# Altium PCB Layer1.PcbDoc
Units mil, origin at the board's own origin, x right, y up, seen from the top; angles counter-clockwise.
Board outline 6000 x 6000 mil, 4 copper layers (Top Layer, Mid Layer 1, Mid Layer 2, Bottom Layer), stack 30.315 mil thick; 1 components, 0 nets, 92 pads, 0 vias.
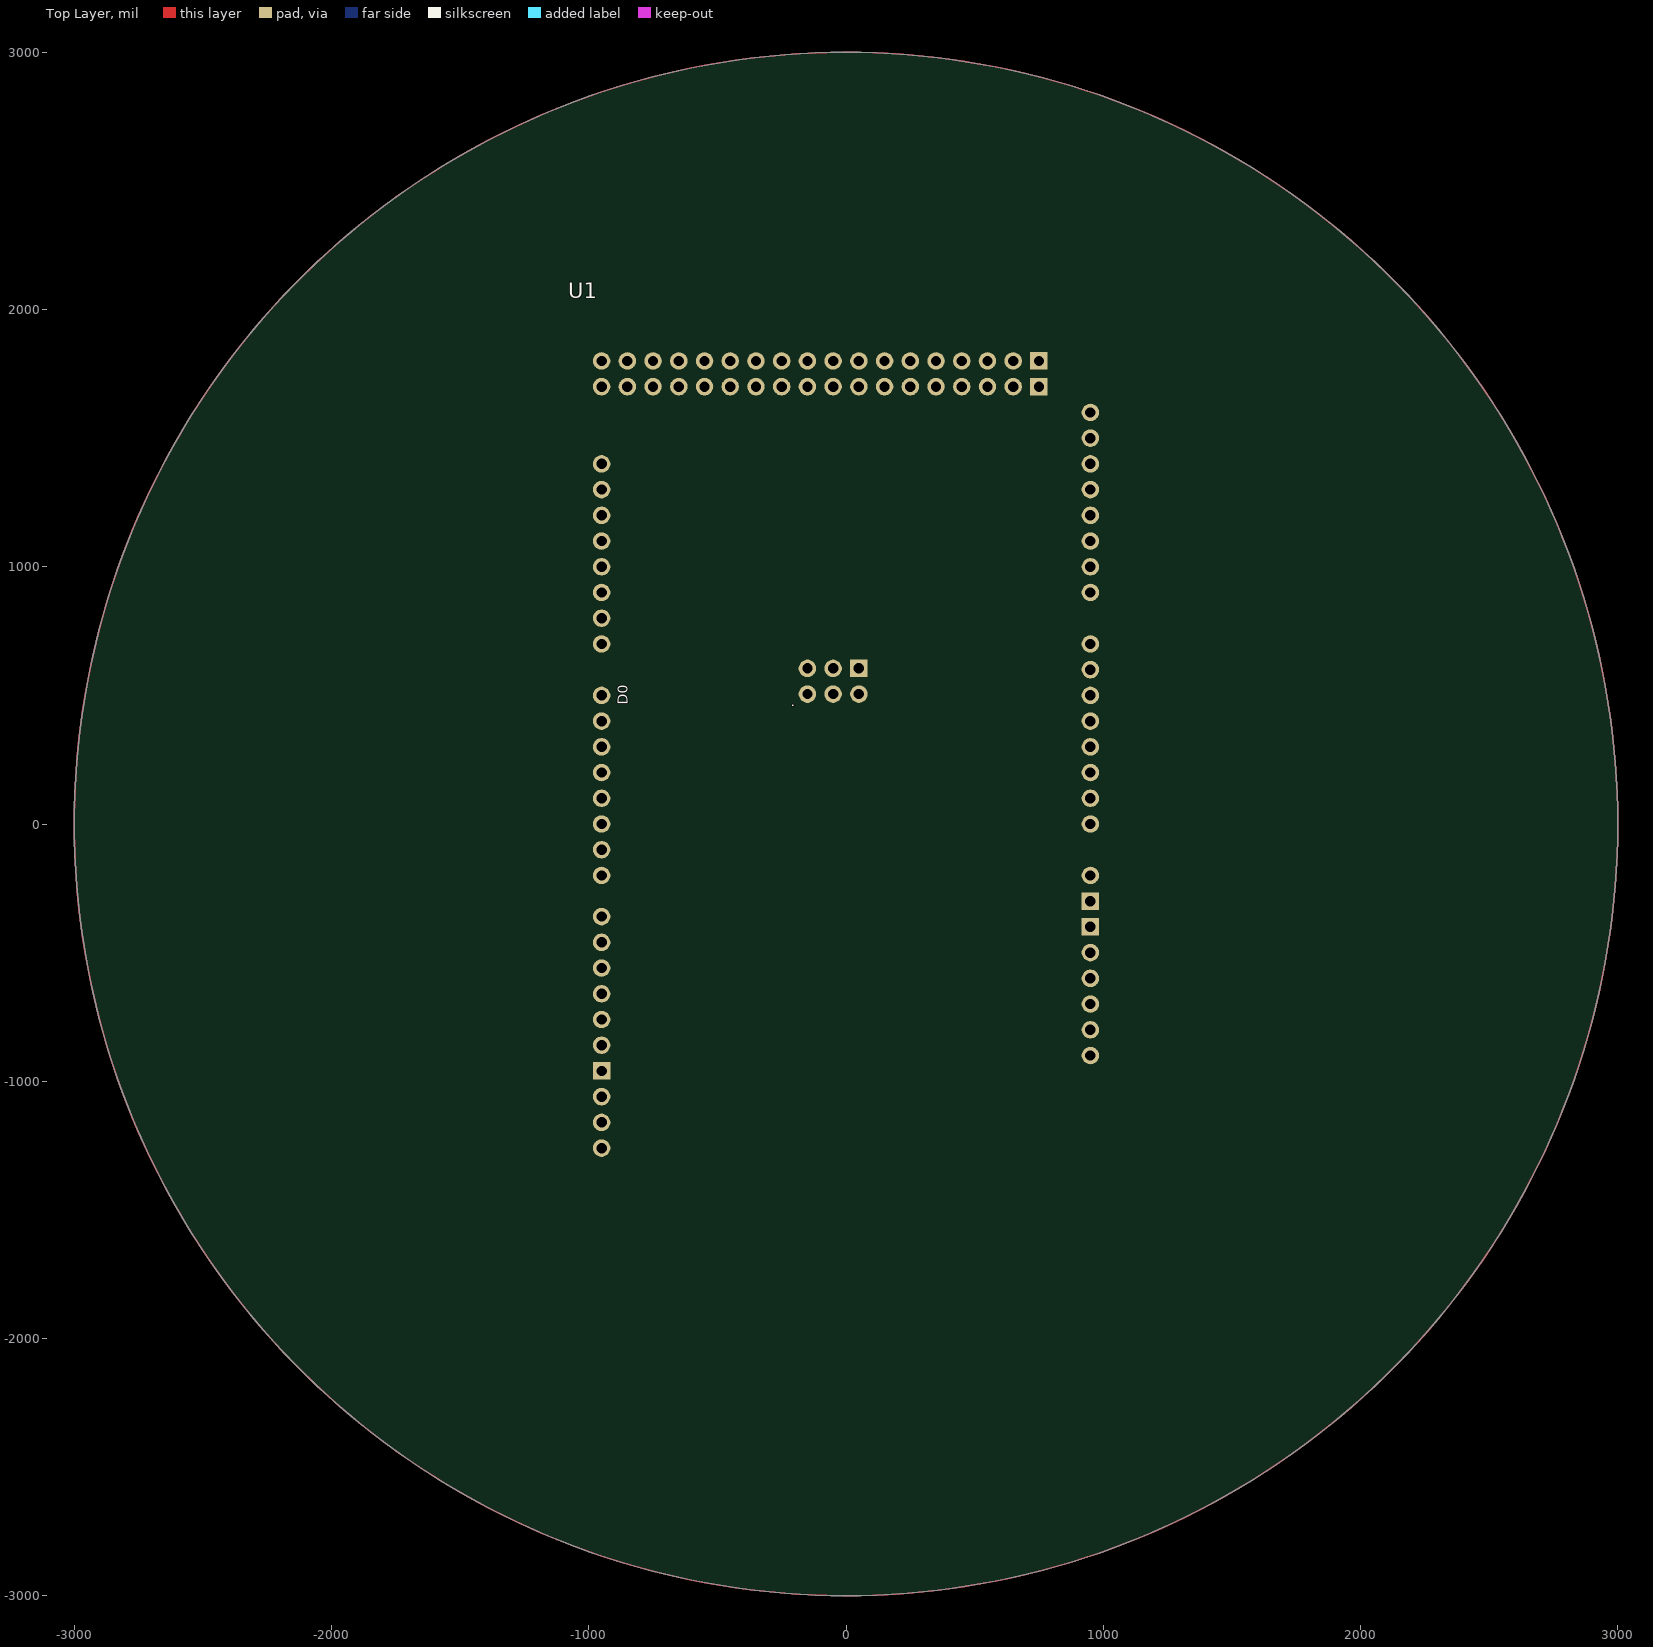
[diagram p0: Top Layer view]
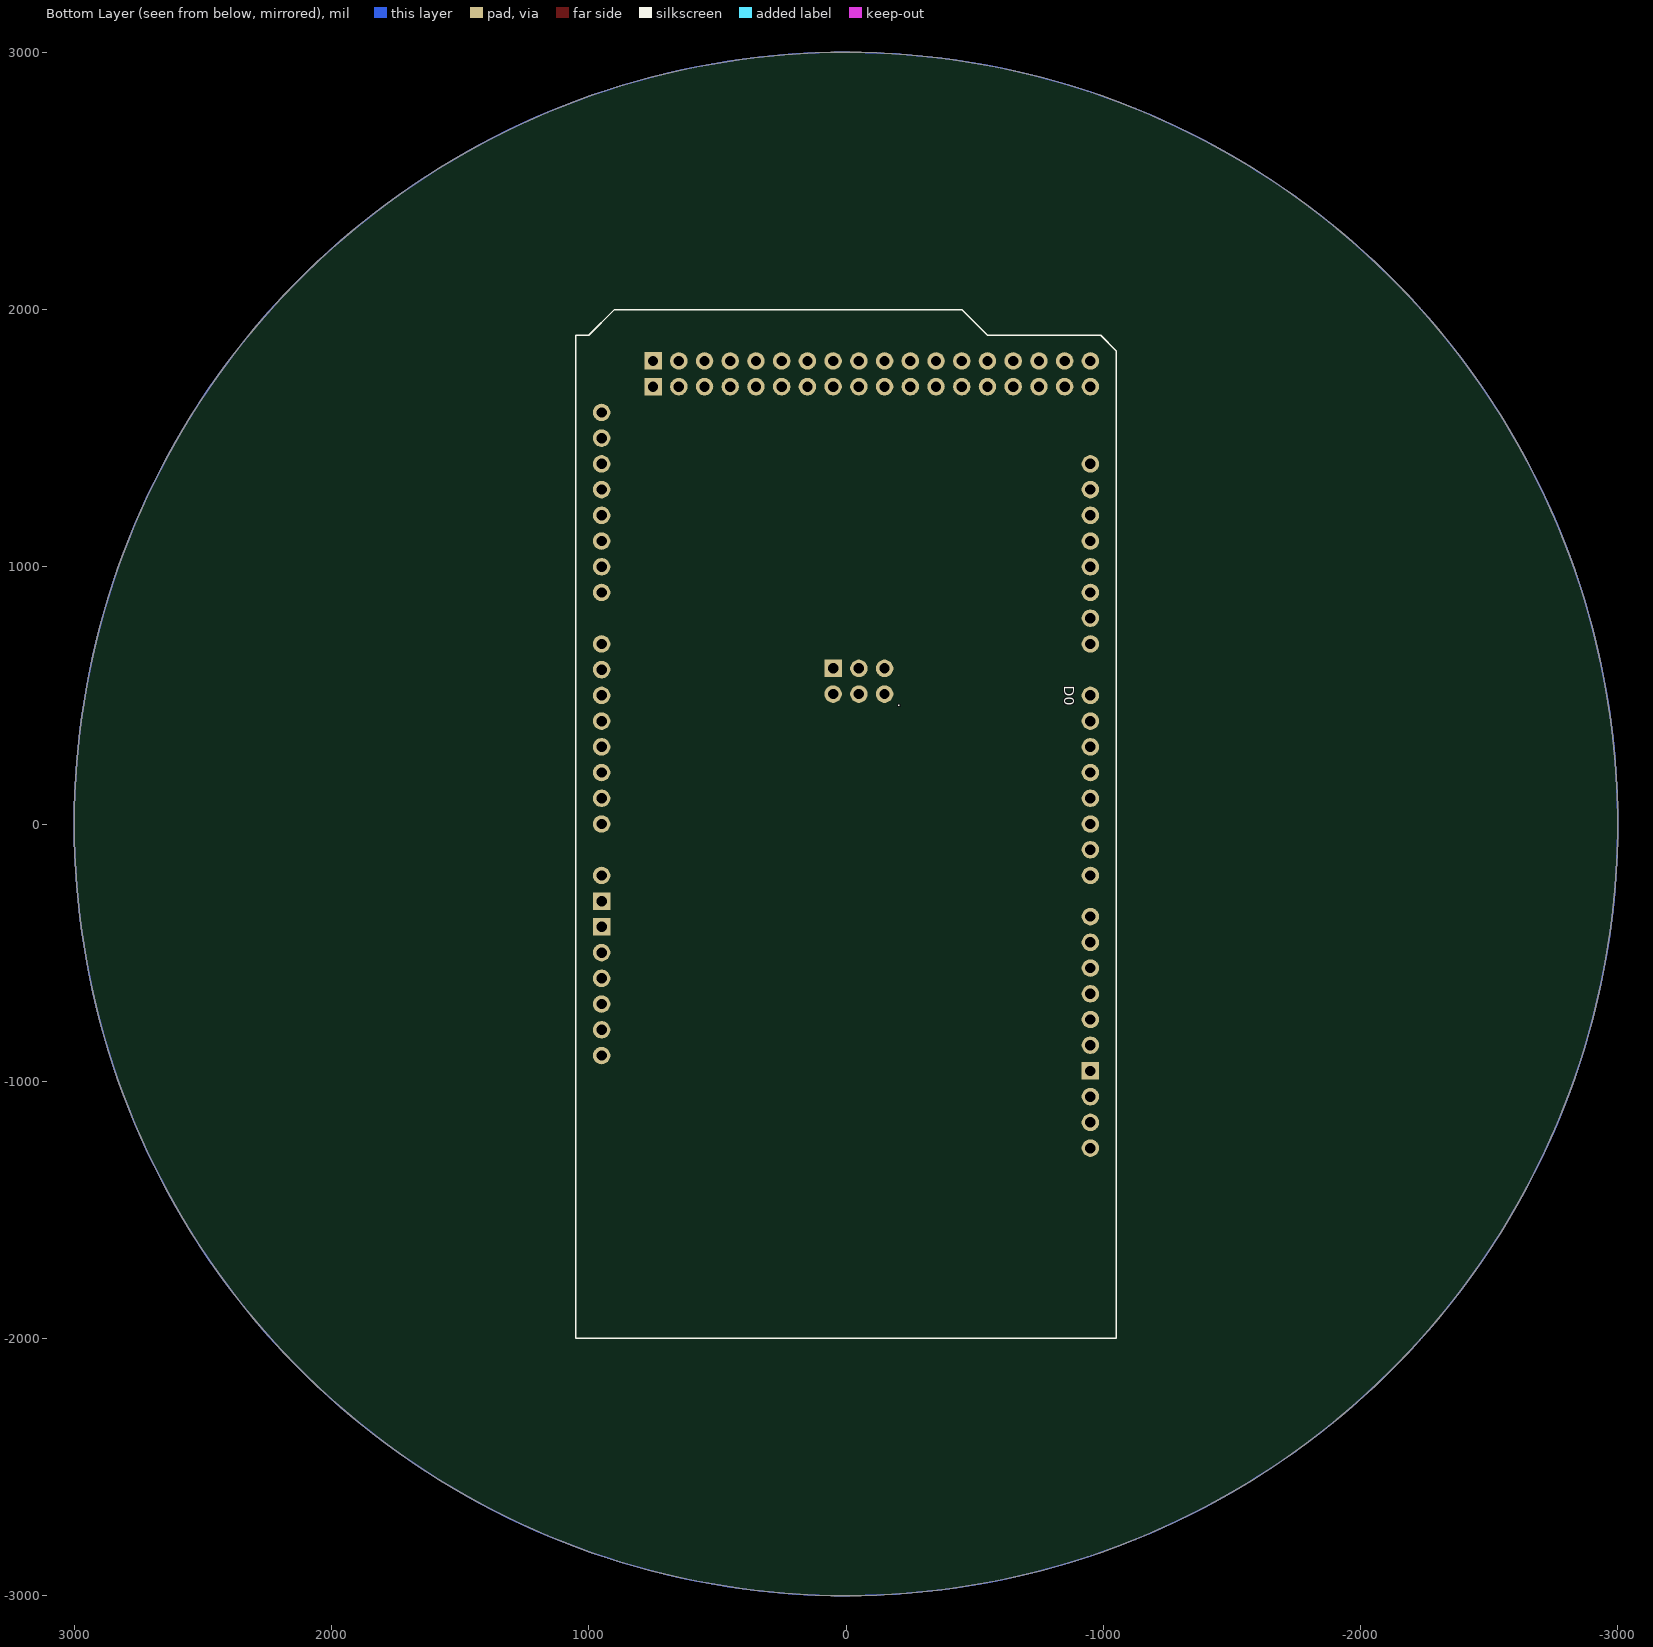
[diagram p1: Bottom Layer view, seen from below]

## Layer stack, top to bottom
Top Solder: solder mask 0.5, Solder Resist, Dk 3.8
Top Layer: signal copper 1.378
Dielectric 1: prepreg 7.874, 7628, Dk 4.6
Mid Layer 1: signal copper 0.689
Core: core 10.4331, FR-4, Dk 4.5
Mid Layer 2: signal copper 0.689
Dielectric 2: prepreg 7.874, 7628, Dk 4.6
Bottom Layer: signal copper 1.378
Bottom Solder: solder mask 0.5, Solder Resist, Dk 3.8

## Board outline
-3000,0 ccw(c0,0) 0,-3000 ccw(c0,0) 3000,0 ccw(c0,0) 0,3000 ccw(c0,0)

## Design rules (kind name [scope] priority, off if disabled: settings)
Clearance [All] p1: gap=10 ignorepadtopadclearanceinfootprint=FALSE except(0: Arc-Hole Track-Hole SMDPad-Hole THPad-Hole Via-Hole Fill-Hole Poly-Hole Region-Hole Text-Hole)
PolygonConnect [All] p1: connectstyle=Relief reliefconductorwidth=10 reliefentries=4 polygonreliefangle="90 Angle" airgapwidth=10
RoutingVias [All] p1: holewidth=28 width=50 viastyle="Through Hole" minholewidth=28 minwidth=50 maxholewidth=28 maxwidth=50
SolderMaskExpansion [All] p1: expansion=4 istentingtop=FALSE
Width [All] p1: maxlimit=10 minlimit=10 preferedwidth=10
30 further rules are at their usual default settings.

## Components (designator, comment, footprint, x,y, rotation, side; value= is the part's Value field where it differs from the comment)
U1 "Giga" Arduino_Giga_R1_WiFi_Shield 1050,-2000 r90 top

## Footprints (in the part's own frame and the unit in brackets; to place one, negate y for a bottom-side part, rotate by r counter-clockwise, add the part's x,y. Pads: shape width x height; smd on the part's side, far side on the other; paste and mask are expansions set on the pad)
Arduino_Giga_R1_WiFi_Shield [mil]
  rrect100% 68x68 hole 40: 3V3(1400,100) 5V1(1500,100) 5V2(2605,1200) 5V3(3700,2000) 5V4(3800,2000) A0(2000,100) A1(2100,100) A2(2200,100) A3(2300,100) A4(2400,100) A5(2500,100) A6(2600,100) A7(2700,100) A8(2900,100) A9(3000,100) A10(3100,100) A11(3200,100) AREF(940,2000) CANR(3500,100) CANT(3600,100) CIPO(1240,2000) COPI(1340,2000) CS(1440,2000) D2(2300,2000) D3(2200,2000) D4(2100,2000) D5(2000,2000) D6(1900,2000) D7(1800,2000) D8(1640,2000) D9(1540,2000) D22(3700,1900) D23(3800,1900) D24(3700,1800) D25(3800,1800) D26(3700,1700) D27(3800,1700) D28(3700,1600) D29(3800,1600) D30(3700,1500) D31(3800,1500) D32(3700,1400) D33(3800,1400) D34(3700,1300) D35(3800,1300) D36(3700,1200) D37(3800,1200) D38(3700,1100) D39(3800,1100) D40(3700,1000) D41(3800,1000) D42(3700,900) D43(3800,900) D44(3700,800) D45(3800,800) D46(3700,700) D47(3800,700) D48(3700,600) D49(3800,600) D50(3700,500) D51(3800,500) D52(3700,400) D53(3800,400) DAC0(3300,100) DAC1(3400,100) IORF(1200,100) MISO(2505,1200) MOSI(2605,1100) NC(1100,100) RST1(1300,100) RST2(2505,1000) RX(2500,2000) RX1(3200,2000) RX2(3000,2000) RX3(2800,2000) SCK1(1140,2000) SCK2(2505,1100) SCL(3400,2000) SCL1(740,2000) SDA(3300,2000) SDA1(840,2000) TX0(2400,2000) TX1(3100,2000) TX2(2900,2000) TX3(2700,2000) VIN(1800,100)
  rect 68x68 hole 40: GND1(1040,2000) GND2(1600,100) GND3(1700,100) GND4(2605,1000) GND5(3700,300) GND6(3800,300)

## Part data
U1: library part Component_1

## Nets (pads, with @x,y where several pads share a name; then routed paths per layer and width w, separated by ;. In a path a pad name is that pad's centre, name@x,y a point inside that pad or via, vN(x,y) a via of type N, cw(c..) or ccw(c..) an arc to the next point about the centre after c; other vN are vias at no path point)
pads on no net: U1.3V3 U1.5V1 U1.5V2 U1.5V3 U1.5V4 U1.A0 U1.A1 U1.A2 U1.A3 U1.A4 U1.A5 U1.A6 U1.A7 U1.A8 U1.A9 U1.A10 U1.A11 U1.AREF U1.CANR U1.CANT U1.CIPO U1.COPI U1.CS U1.D2 U1.D3 U1.D4 U1.D5 U1.D6 U1.D7 U1.D8 U1.D9 U1.D22 U1.D23 U1.D24 U1.D25 U1.D26 U1.D27 U1.D28 U1.D29 U1.D30 U1.D31 U1.D32 U1.D33 U1.D34 U1.D35 U1.D36 U1.D37 U1.D38 U1.D39 U1.D40 U1.D41 U1.D42 U1.D43 U1.D44 U1.D45 U1.D46 U1.D47 U1.D48 U1.D49 U1.D50 U1.D51 U1.D52 U1.D53 U1.DAC0 U1.DAC1 U1.GND1 U1.GND2 U1.GND3 U1.GND4 U1.GND5 U1.GND6 U1.IORF U1.MISO U1.MOSI U1.NC U1.RST1 U1.RST2 U1.RX U1.RX1 U1.RX2 U1.RX3 U1.SCK1 U1.SCK2 U1.SCL U1.SCL1 U1.SDA U1.SDA1 U1.TX0 U1.TX1 U1.TX2 U1.TX3 U1.VIN

## Other copper
Multi-Layer:
  circle w6: c0,0 r3000

## Text inside footprints (layer, text, board x,y; h text height)
U1: Top Overlay "D0" at -849.41,463.45 h39.37 r90; Bottom Overlay "D0" at -849.41,536.55 h39.37 r90; Mechanical 5 "USB A" at 130.71,-1750.49 h19.68 r90; Mechanical 5 "Audio Jack" at 688.66,-1726.49 h19.68 r90; Mechanical 5 "USB C" at -492.32,-1850.56 h19.68 r90